# EAGLE board SOIC16-TSSOP16 v1.0 (EAGLE 7.2.0)
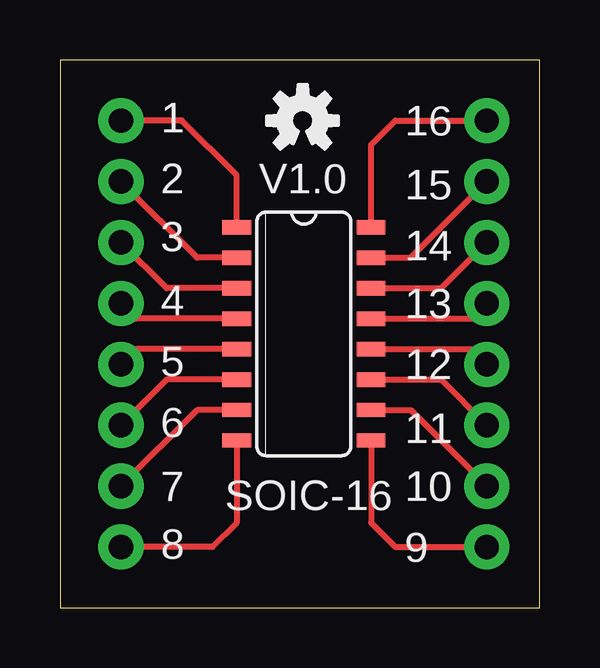
[diagram p0: board, top side]
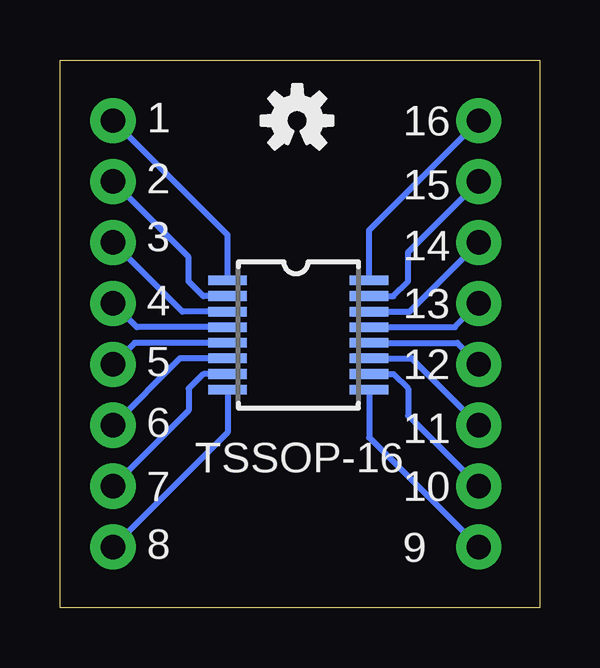
[diagram p1: board, bottom side, seen from below]

Size 19.99 x 22.85 mm. Coordinates in mm from the lower left corner, seen from the top.
Outline: 0,0 19.99,0 19.99,22.85 0,22.85 0,0
Copper layers (1*16): Top 0.0356mm / dielectric 1.5011mm / Bottom 0.0356mm
Design rules "OSH Park": minimum track width 6mil, minimum drill 13mil, track to track 6mil, track to pad 6mil, pad to pad 6mil, via to via 6mil, smd to smd 6mil, copper to edge 15mil, drill to drill 6mil, minimum pad ring 7mil, minimum via ring 7mil, stop-mask expansion 3mil, vias tented up to drill 0mil, thermal gap 10mil

## Footprints (pad centres in the part's own frame; a part is rotated, then mirrored left to right if it is on the bottom)
1X08_NO_SILK = drill 1.016 pad 1.88: 1 0,0; 2 2.54,0; 3 5.08,0; 4 7.62,0; 5 10.16,0; 6 12.7,0; 7 15.24,0; 8 17.78,0
SO16 = smd 0.6 x 1.2: 1 -4.445,-2.8; 2 -3.175,-2.8; 3 -1.905,-2.8; 4 -0.635,-2.8; 5 0.635,-2.8; 6 1.905,-2.8; 7 3.175,-2.8; 8 4.445,-2.8; 9 4.445,2.8; 10 3.175,2.8; 11 1.905,2.8; 12 0.635,2.8; 13 -0.635,2.8; 14 -1.905,2.8; 15 -3.175,2.8; 16 -4.445,2.8
TSSOP16 = smd 0.4 x 1.6: 1 -2.225,-2.85; 2 -1.575,-2.85; 3 -0.925,-2.85; 4 -0.275,-2.85; 5 0.375,-2.85; 6 1.025,-2.85; 7 1.675,-2.85; 8 2.325,-2.85; 9 2.325,3.05; 10 1.675,3.05; 11 1.025,3.05; 12 0.375,3.05; 13 -0.275,3.05; 14 -0.925,3.05; 15 -1.575,3.05; 16 -2.225,3.05

## Placement (x,y rotation side)
FRAME1  FRAME-LETTER  [CREATIVE_COMMONS]  -9.65,-7.82 0 top  (outside the outline)
JP1  [1X08_NO_SILK]  2.54,2.54 90 top
JP2  [1X08_NO_SILK]  17.78,2.54 90 top
U$1  SOIC-16  [SO16]  10.16,11.43 270 top
U$2  TSSOP-16  [TSSOP16]  10.16,11.43 270 bottom
U$3  [OSHW-LOGO-S]  10.11,20.32 0 top
U$4  [OSHW-LOGO-S]  10.11,20.32 0 bottom

## Library data of the parts
FRAME1 U$3 U$4 = SparkFun-Aesthetics
JP1 JP2 = SparkFun-Connectors
U$1 U$2 = Kevin-GenericICFootprints

## Nets
N$1: JP1.8 U$1.1 U$2.16
N$2: JP1.7 U$1.2 U$2.15
N$3: JP1.6 U$1.3 U$2.14
N$4: JP1.5 U$1.4 U$2.13
N$5: JP1.4 U$1.5 U$2.12
N$6: JP1.3 U$1.6 U$2.11
N$7: JP1.2 U$1.7 U$2.10
N$8: JP1.1 U$1.8 U$2.9
N$11: JP2.8 U$1.16 U$2.1
N$12: JP2.7 U$1.15 U$2.2
N$13: JP2.6 U$1.14 U$2.3
N$14: JP2.5 U$1.13 U$2.4
N$15: JP2.4 U$1.12 U$2.5
N$16: JP2.3 U$1.11 U$2.6
N$17: JP2.2 U$1.10 U$2.7
N$18: JP2.1 U$1.9 U$2.8

## Tracks (layer width: path | path; a pad name or v marks a point on that pad's centre or on a via)
N$1
  Top 0.254: U$1.1 7.36,18.04 5.08,20.32 JP1.8
  Bottom 0.254: U$2.16 7.11,15.75 JP1.8
N$2
  Top 0.254: U$1.2 5.71,14.6 JP1.7
  Bottom 0.254: U$2.15 6.1,13.01 5.49,13.61 5.49,14.83 JP1.7
N$3
  Top 0.254: U$1.3 4.45,13.33 JP1.6
  Bottom 0.254: U$2.14 5.42,12.35 JP1.6
N$4
  Top 0.254: U$1.4 3.17,12.06 JP1.5
  Bottom 0.254: U$2.13 3.54,11.71 JP1.5
N$5
  Top 0.254: U$1.5 3.17,10.79 JP1.4
  Bottom 0.254: U$2.12 3.44,11.06 JP1.4
N$6
  Top 0.254: U$1.6 4.45,9.53 JP1.3
  Bottom 0.254: U$2.11 5.33,10.4 JP1.3
N$7
  Top 0.254: U$1.7 5.71,8.26 JP1.2
  Bottom 0.254: U$2.10 6.1,9.76 5.49,9.14 5.49,8.03 JP1.2
N$8
  Top 0.254: U$1.8 7.36,3.55 6.35,2.54 JP1.1
  Bottom 0.254: U$2.9 7.11,7.11 JP1.1
N$11
  Top 0.254: U$1.16 12.96,19.31 13.97,20.32 JP2.8
  Bottom 0.254: U$2.1 13.01,15.55 JP2.8
N$12
  Top 0.254: U$1.15 14.61,14.6 JP2.7
  Bottom 0.254: U$2.2 14.02,13.01 14.63,13.61 14.63,14.63 JP2.7
N$13
  Top 0.254: U$1.14 15.88,13.33 JP2.6
  Bottom 0.254: U$2.3 14.89,12.35 JP2.6
N$14
  Top 0.254: U$1.13 17.14,12.06 JP2.5
  Bottom 0.254: U$2.4 16.79,11.71 JP2.5
N$15
  Top 0.254: U$1.12 17.14,10.79 JP2.4
  Bottom 0.254: U$2.5 16.89,11.06 JP2.4
N$16
  Top 0.254: U$1.11 15.88,9.53 JP2.3
  Bottom 0.254: U$2.6 14.99,10.4 JP2.3
N$17
  Top 0.254: U$1.10 14.61,8.26 JP2.2
  Bottom 0.254: U$2.7 14.02,9.76 14.63,9.14 14.63,8.23 JP2.2
N$18
  Top 0.254: U$1.9 12.96,3.55 13.97,2.54 JP2.1
  Bottom 0.254: U$2.8 13.01,7.31 JP2.1

## Text on the board
tPlace: 1 | 16 | 2 | V1.0 | 15 | 3 | 14 | 4 | 13 | 5 | 12 | 6 | 11 | 7 | 10 | SOIC-16 | 8 | 9
bPlace: 16 | 1 | 15 | 2 | 14 | 3 | 13 | 4 | 12 | 5 | 11 | 6 | TSSOP-16 | 10 | 7 | 9 | 8
tDocu: Kevin Neubauer